# Altium PCB stm32cbt6.PcbDoc
Units mil, origin at the board's own origin, x right, y up, seen from the top; angles counter-clockwise.
Board outline 1579.03 x 1585.03 mil, 2 copper layers (Top Layer, Bottom Layer); 29 components, 17 nets, 121 pads, 15 vias.
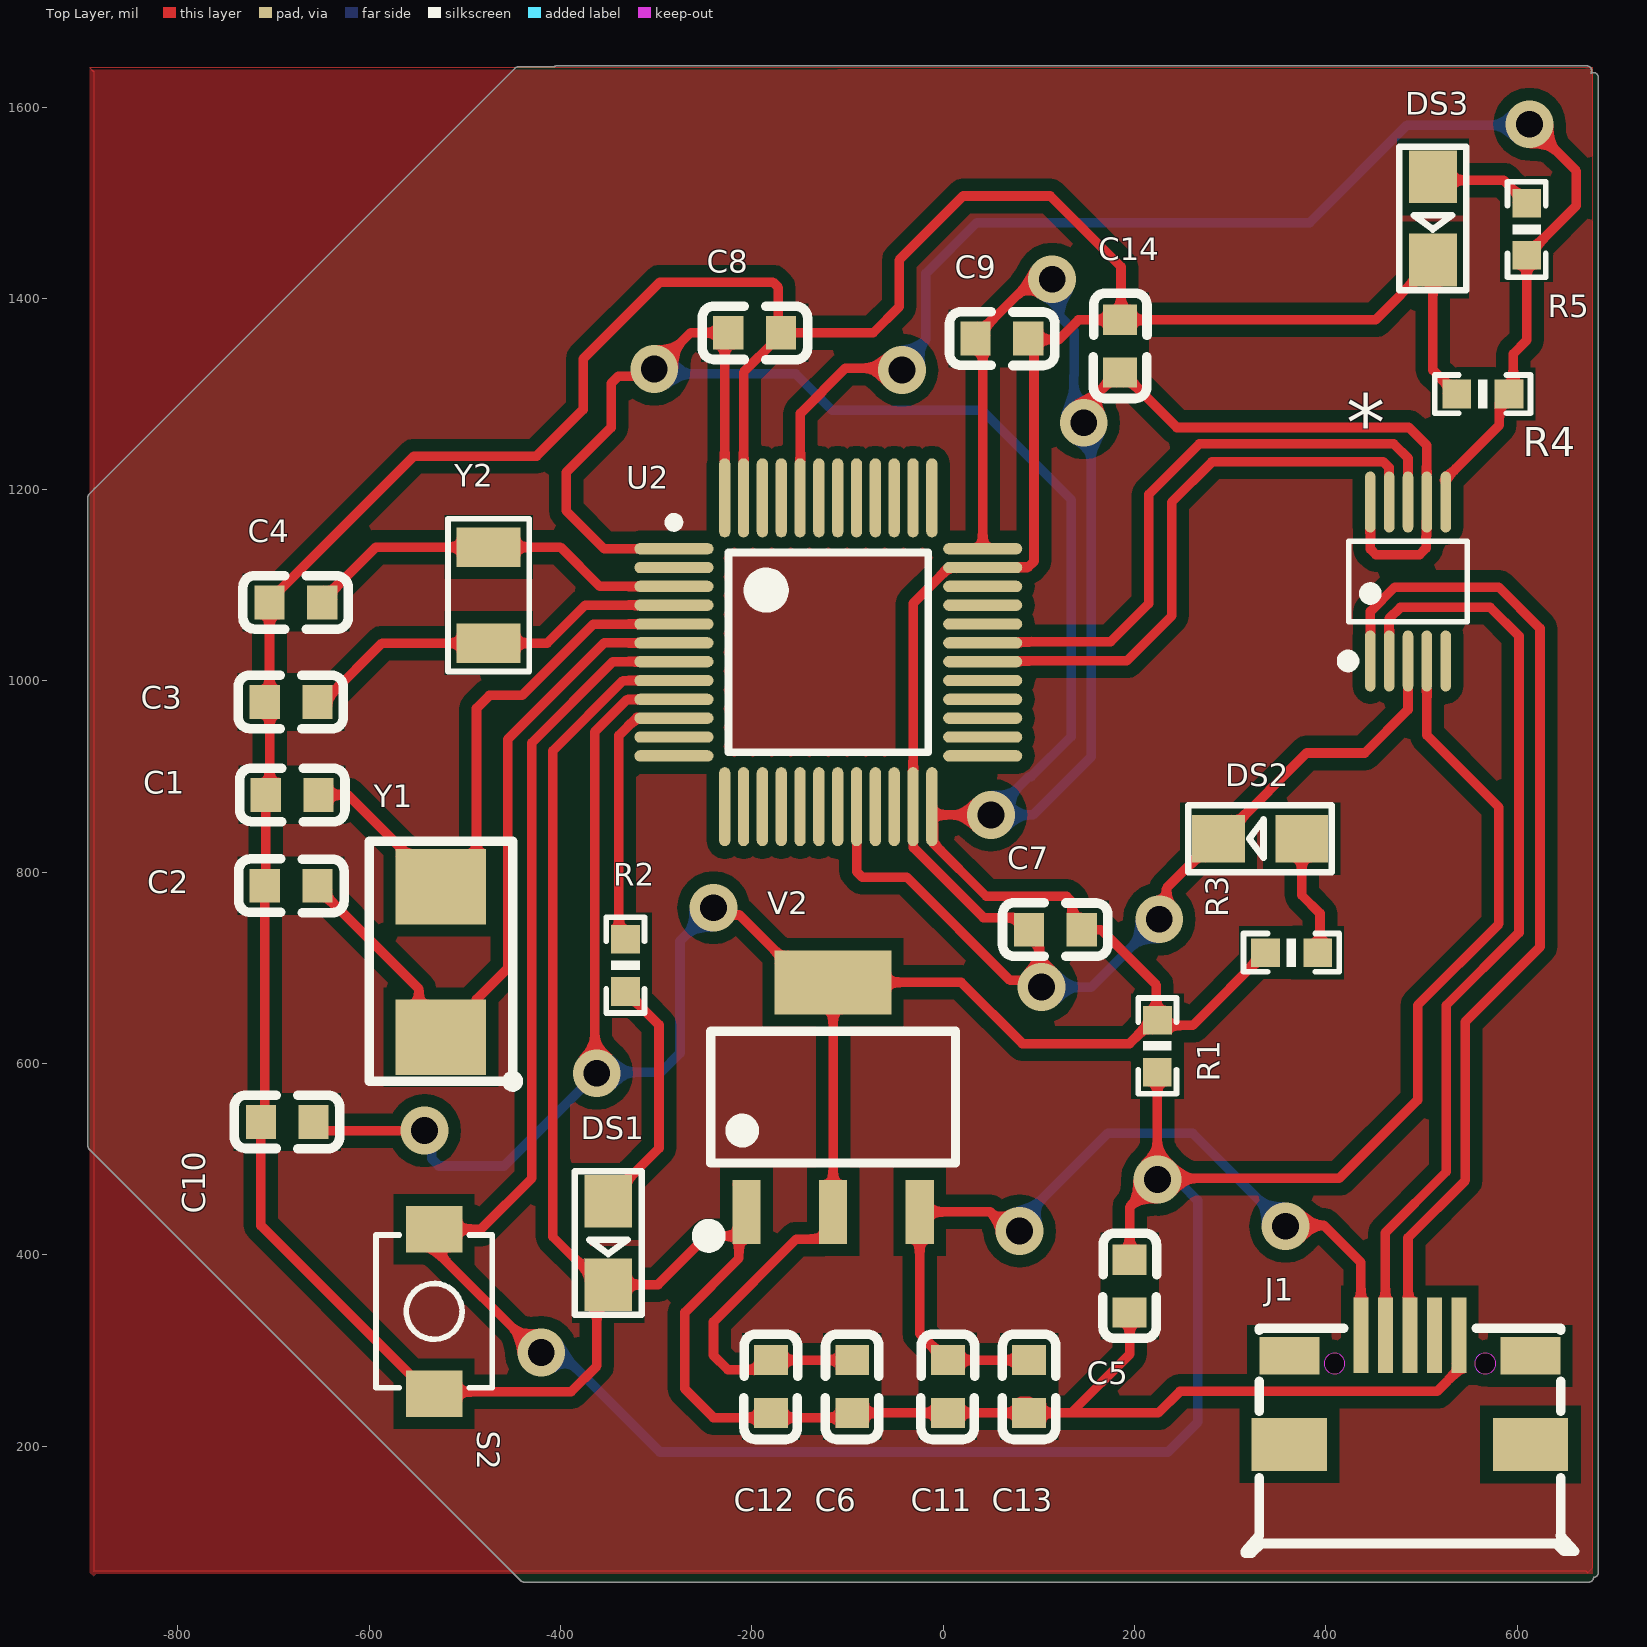
[diagram p0: Top Layer view]
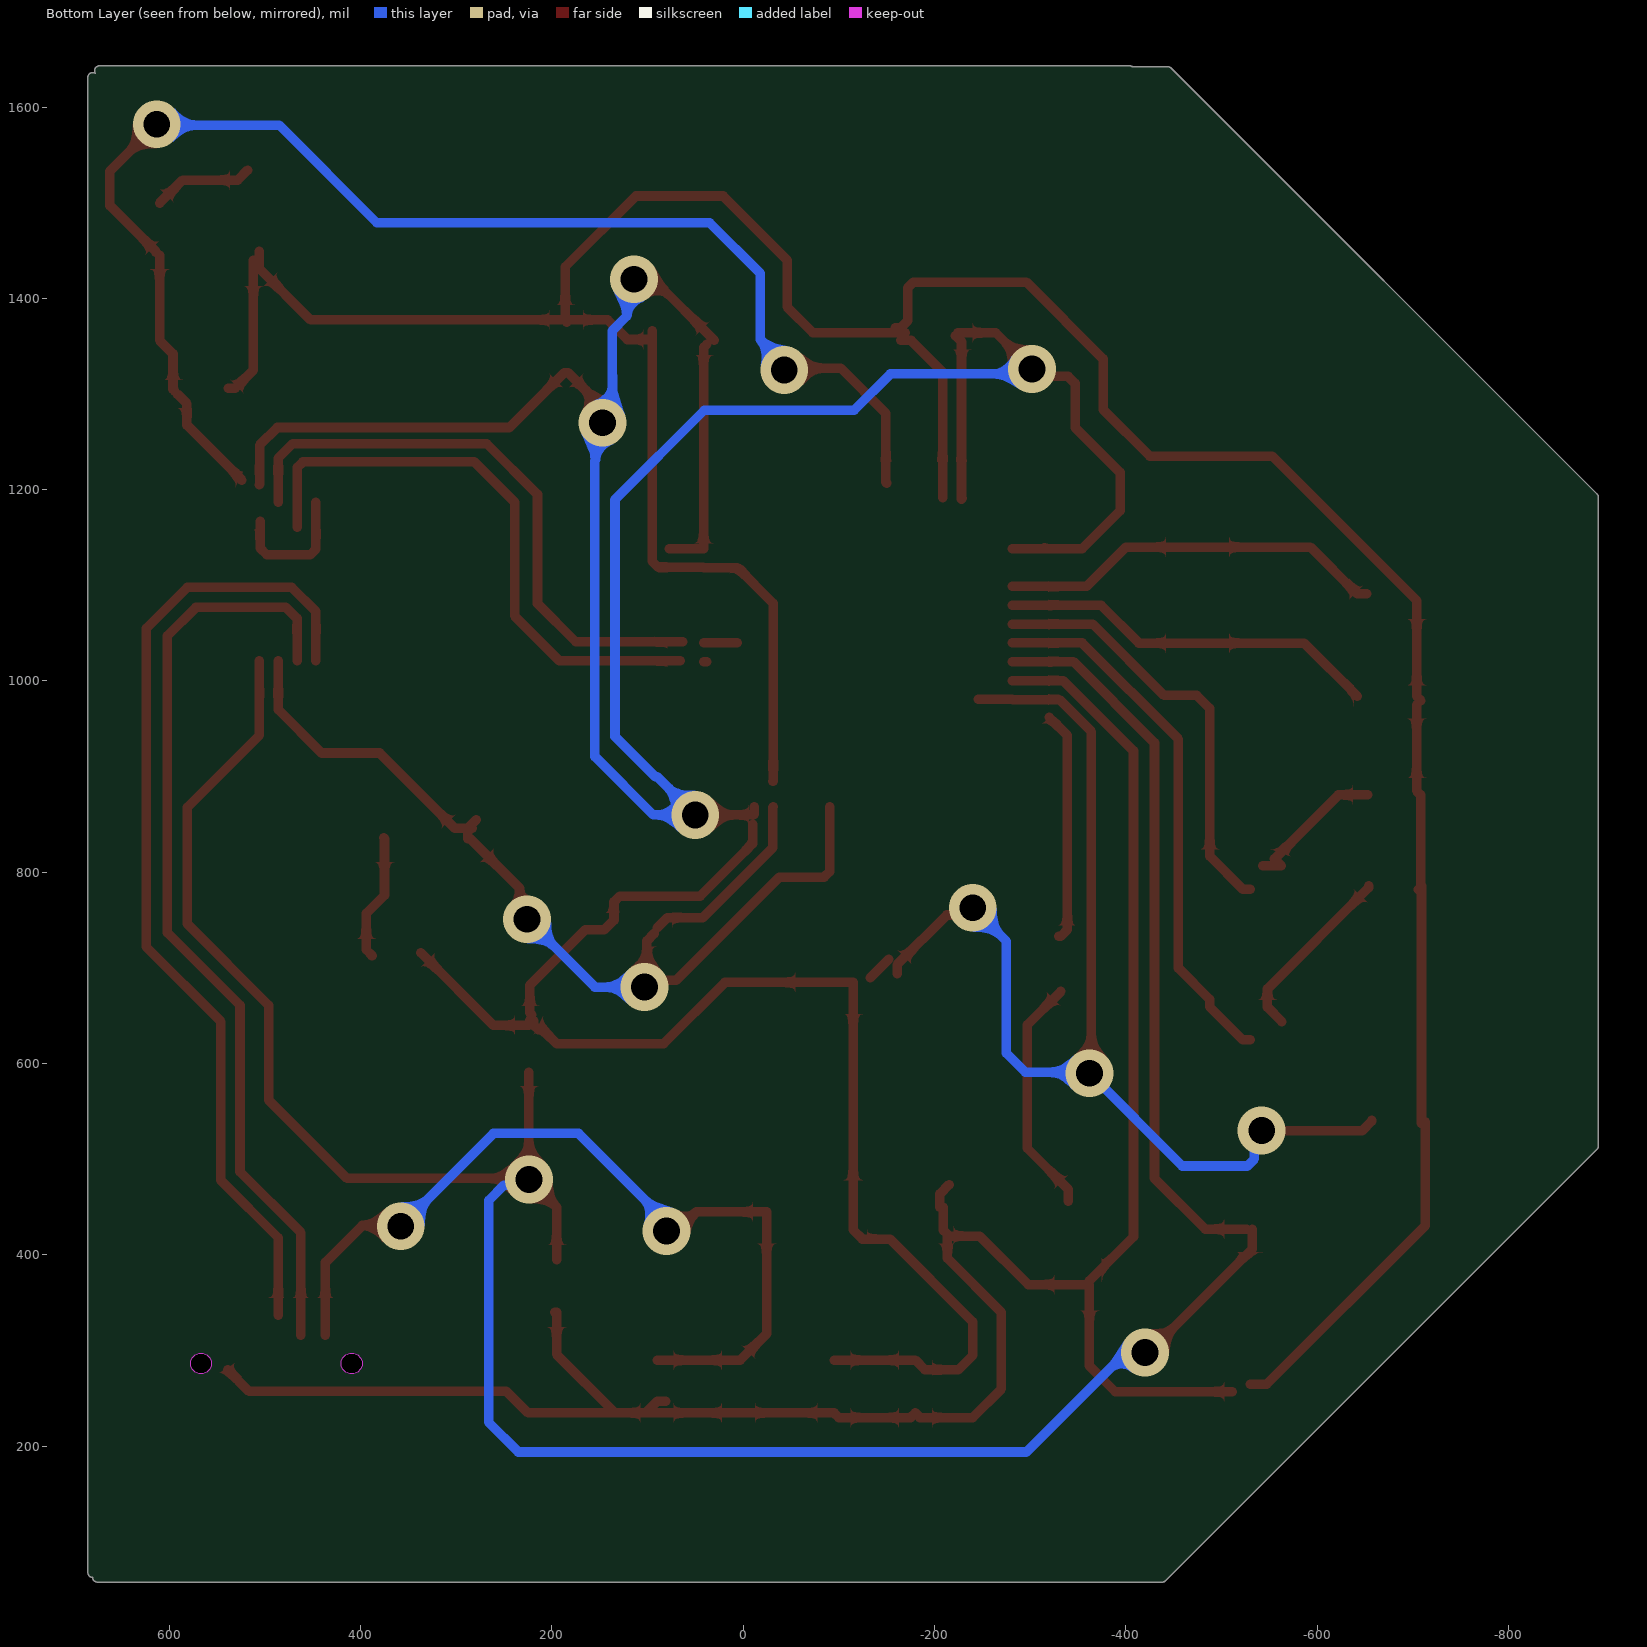
[diagram p1: Bottom Layer view, seen from below]

## Layer stack, top to bottom
Top Solder: solder mask 0.4, Solder Resist, Dk 3.5
Top Layer: signal copper 1.4
Dielectric 1: dielectric 12.6, FR-4, Dk 4.8
Bottom Layer: signal copper 1.4
Bottom Solder: solder mask 0.4, Solder Resist, Dk 3.5

## Board outline
-892.53,510.44 cw(c-889,514) -894.01,514 -894.01,1192 cw(c-889,1192) -892.53,1195.56 -892.55,1195.55 -447.55,1640.55 -447.56,1640.53 cw(c-444,1637) -444,1642.01 -407.01,1642.01 cw(c-404,1638) -404,1643.01 673,1643.01 cw(c673,1638) 678.01,1638 cw(c673,1638) 677.07,1635.07 cw(c680,1631) 685.01,1631 685.01,68 cw(c680,68) 680.01,62.99 cw(c675,63) 675,57.99 -438,57.99 cw(c-438,63) -441.56,59.47 -441.55,59.45

## Design rules (kind name [scope] priority, off if disabled: settings)
Clearance [All] p1: gap=3 ignorepadtopadclearanceinfootprint=TRUE
MinimumSolderMaskSliver [All] p1: minsoldermaskwidth=2
PolygonConnect [All] p1: connectstyle=Relief reliefconductorwidth=10 reliefentries=4 polygonreliefangle="90 Angle" airgapwidth=10
RoutingVias [All] p1: holewidth=28 width=50 viastyle="Through Hole" minholewidth=28 minwidth=50 maxholewidth=28 maxwidth=50
SilkToSolderMaskClearance [IsPad] p1: minsilkscreentomaskgap=2 clearancetoexposedcopper=TRUE
SolderMaskExpansion [All] p1: expansion=4
Width [All] p1: maxlimit=10 minlimit=10 preferedwidth=10
28 further rules are at their usual default settings.

## Classes and differential pairs
component class stm32f103cbt6: * C1 C2 C3 C4 C5 C6 C7 C8 C9 C10 C11 C12 C13 C14 DS1 DS2 J1 R1 R2 R3 R5 S2 U2 V2 Y1 Y2

## Components (designator, comment, footprint, x,y, rotation, side; value= is the part's Value field where it differs from the comment)
* "ch340x" MSOP-10_L3.0-W3.0-P0.50-LS5.0-BL 486,1104 r0 top
C1 "20pF" C0603 -680.56,881 r180 top
C2 "20pF" C0603 -681.56,786 r180 top
C3 "15pF" C0603 -681.56,978 r0 top
C4 "15pF" C0603 -676.56,1082 r0 top
C5 "100nF" C0603 195,367.44 r270 top
C6 "10uF" C0603 -95,262.44 r90 top
C7 "100nF" C0603 117.44,740 r0 top
C8 "100nF" C0603 -197,1364 r180 top
C9 "100nF" C0603 61.44,1358 r180 top
C10 "100nF" C0603 -685.56,539 r0 top
C11 "100nF" C0603 5,262.44 r90 top
C12 "100nF" C0603 -180,262.44 r90 top
C13 "10uF" C0603 90,262.44 r90 top
C14 "100nF" C0603 185,1350 r270 top
DS1 "LED2" SMDLED -349.94,456.03 r270 top
DS2 "LED1" SMDLED 374.97,835.06 r180 top
DS3 "LED2" SMDLED 512.06,1527.04 r270 top
J1 "Micro_USB" MICRO-USB-SMD_MICROQTJ 488,259 r0 top
R1 "10K" 0603P 224.06,618.5 r270 top
R2 "10K" 0603P -332,703 r270 top
R3 "10K" 0603P 364,716 r0 top
R4 "4.7K" 0603P 564,1300 r0 top
R5 "10K" 0603P 610,1472 r90 top
S2 "SW-PB" KEY-SMD_L3.9-W3.0-LS5.0 -532,341 r270 top
U2 "STM32F103C" LQFP-48_M -120,1030 r0 top
V2 "AMS1117-3V3" SOT223_L -115,565 r0 top
Y1 "8M" XTAL(5032) -525,706.26 r90 top
Y2 "32K768" CRYSTAL-SMD_L3.2-W1.5-1 -475,1089.8 r270 top

## Footprints (in the part's own frame and the unit in brackets; to place one, negate y for a bottom-side part, rotate by r counter-clockwise, add the part's x,y. Pads: shape width x height; smd on the part's side, far side on the other; paste and mask are expansions set on the pad)
0603P [mil]
  rect 30x30 smd: 1(-27,0) 2(27.5,-0.06)
  silkscreen extent -50,-20 50,20
C0603 [mm]
  rect 0.8x0.9 smd mask+0.051: 1(-0.7,0) 2(0.7,0)
  silkscreen extent -1.41,-0.71 1.39,0.72
CRYSTAL-SMD_L3.2-W1.5-1 [mil]
  rect 41.3x66.9 smd mask+2: 1(-50.2,0) 2(50.2,0)
  silkscreen extent -80,-43 80,43
KEY-SMD_L3.9-W3.0-LS5.0 [mil]
  rect 48.4x59.1 smd mask+2: 1(-86,0) 2(86,0)
  silkscreen extent -80,-61 80,61
LQFP-48_M [mm] "Thin QFP, 48-Leads, Body 7x7mm, Pitch 0.5mm, IPC Low Density"
  oval 2.1x0.3 smd: 1(-4.1,2.75) 2(-4.1,2.25) 3(-4.1,1.75) 4(-4.1,1.25) 5(-4.1,0.75) 6(-4.1,0.25) 7(-4.1,-0.25) 8(-4.1,-0.75) 9(-4.1,-1.25) 10(-4.1,-1.75) 11(-4.1,-2.25) 12(-4.1,-2.75) 25(4.1,-2.75) 26(4.1,-2.25) 27(4.1,-1.75) 28(4.1,-1.25) 29(4.1,-0.75) 30(4.1,-0.25) 31(4.1,0.25) 32(4.1,0.75) 33(4.1,1.25) 34(4.1,1.75) 35(4.1,2.25) 36(4.1,2.75)
  oval 0.3x2.1 smd: 13(-2.75,-4.1) 14(-2.25,-4.1) 15(-1.75,-4.1) 16(-1.25,-4.1) 17(-0.75,-4.1) 18(-0.25,-4.1) 19(0.25,-4.1) 20(0.75,-4.1) 21(1.25,-4.1) 22(1.75,-4.1) 23(2.25,-4.1) 24(2.75,-4.1) 37(2.75,4.1) 38(2.25,4.1) 39(1.75,4.1) 40(1.25,4.1) 41(0.75,4.1) 42(0.25,4.1) 43(-0.25,4.1) 44(-0.75,4.1) 45(-1.25,4.1) 46(-1.75,4.1) 47(-2.25,4.1) 48(-2.75,4.1)
  silkscreen extent -4.22,-2.65 2.65,3.57, body extent -3.5,-3.5 3.5,3.5, height 1.6
MICRO-USB-SMD_MICROQTJ [mm]
  rect 0.4x2 smd mask+0.051: 1(-1.3,1.452) 2(-0.65,1.452) 3(0,1.452) 4(0.65,1.452) 5(1.3,1.452)
  rect 1.6x1 smd mask+0.051: 6(-3.2,0.902) 9(3.2,0.902)
  rect 2x1.4 smd mask+0.051: 7(-3.2,-1.452) 8(3.2,-1.452)
  Keep-Out Layer board cut-out: -1.725,0.698 -1.725,0.753 -1.767,0.854 -1.844,0.931 -1.946,0.973 -2.055,0.973 -2.156,0.931 -2.233,0.854 -2.275,0.753 -2.275,0.698 -2.275,0.643 -2.233,0.542 -2.156,0.465 -2.055,0.423 -1.946,0.423 -1.844,0.465 -1.767,0.542 -1.725,0.643 -1.725,0.698 -1.725,0.698
  Keep-Out Layer board cut-out: 2.275,0.698 2.275,0.753 2.233,0.854 2.156,0.931 2.054,0.973 1.945,0.973 1.844,0.931 1.767,0.854 1.725,0.753 1.725,0.698 1.725,0.643 1.767,0.542 1.844,0.465 1.945,0.423 2.054,0.423 2.156,0.465 2.233,0.542 2.275,0.643 2.275,0.698 2.275,0.698
  silkscreen extent -4.37,-4.34 4.38,1.63
MSOP-10_L3.0-W3.0-P0.50-LS5.0-BL [mm]
  oval 0.28x1.62 smd mask+0.051: 1(-1,-2.11) 2(-0.5,-2.11) 3(0,-2.11) 4(0.5,-2.11) 5(1,-2.11) 6(1,2.11) 7(0.5,2.11) 8(0,2.11) 9(-0.5,2.11) 10(-1,2.11)
  silkscreen extent -1.74,-2.26 1.58,1.07
SMDLED [mm] "Chip Resistor, Body 2.0x1.2mm, IPC High Density"
  rect 1.4x1.27 smd: 1(0.001,-0.002) 2(2.211,-0.002)
  silkscreen extent -0.8,-0.89 3.01,0.89
SOT223_L [mm] "6.4x7x1.6mm(长宽高)"
  rect 0.75x1.7 smd: 1(-2.3,-3.048) 2(0,-3.048) 3(2.3,-3.048)
  rect 3.1x1.7 smd: 2(0,3.048)
  silkscreen extent -3.5,-3.88 3.25,1.75, body extent -3.25,-3.51 3.25,3.51, height 1.65
XTAL(5032) [mm]
  rect 2x2.4 smd: 1(-2,0) 2(2,0)
  silkscreen extent -3.32,-2.06 3.21,1.91

## Part data
C1 C2 C3 C4 C5 C6 C7 C8 C9 C10 C11 C12 C13 C14: library part Cap, "Capacitor", LatestRevisionDate=17-Jul-2002, LatestRevisionNote="Re-released for DXP Platform.", PackageDescription="Radial Cap, Thru-Hole; 2 Leads; 0.3 in Pin Spacing", PackageReference=RAD-0.3, Published=8-Jun-2000, Publisher="Altium Limited"
DS1 DS3: "Typical RED, GREEN, YELLOW, AMBER GaAs LED"
DS2: library part LED2, "Typical RED, GREEN, YELLOW, AMBER GaAs LED"
R1 R2 R3 R4 R5: library part R
S2: "Switch", LatestRevisionDate=17-Jul-2002, LatestRevisionNote="Re-released for DXP Platform.", PackageDescription="Switch; 2 Leads", PackageReference=SPST-2, Published=24-Mar-1999, Publisher="Altium Limited"
U2: "STM32单片机48引脚"
V2: library part AMS1117, "三端稳压芯片", BOM名称=稳压芯片, 学习资源=www.ooocke.com, 版权归属=源创客
Y1 Y2: library part XTAL, "Crystal Oscillator", LatestRevisionDate=17-Jul-2002, LatestRevisionNote="Re-released for DXP Platform.", PackageDescription="Crystal, Thru-Hole; 2 Leads; Body 3.1 x 8.2 mm (Dia.xH)", PackageReference=R38, Published=8-Jun-2000, Publisher="Altium Limited"

## Via types
v1: diameter 50, hole 28, Top Layer to Bottom Layer, 15 vias

## Nets (pads, with @x,y where several pads share a name; then routed paths per layer and width w, separated by ;. In a path a pad name is that pad's centre, name@x,y a point inside that pad or via, vN(x,y) a via of type N, cw(c..) or ccw(c..) an arc to the next point about the centre after c; other vN are vias at no path point)
3V3: *.7 *.10 C6.2 C7.2 C8.2 C9.2 C10.2 C12.2 C14.2 R1.1 R3.1 U2.1 U2.9 U2.24 U2.36 U2.48 V2.2 | length 5867.9
  Top Layer w10: C10.2@-657,541 -657,539.75 -647.25,530 v1(-542,530) ; v1@-366,596 -364,598 -364,947 -330.56,980.44 -281.76,980.44 U2.9 U2.9@-245.98,980.79 ; U2.1@-317.44,1138.86 -315.14,1138.86 U2.1@-315,1139 ; v1@-309,1332 -309,1329.82 -320.48,1318.35 -339.65,1318.35 -347,1311 -347,1265 -394,1218 -394,1178 -354.27,1138.27 U2.1 ; v1@-302,1325.43 v1(-302,1326) ; v1@-295,1333 -264,1364 C8.2 ; v1(-240,763) -232.35,755.35 -212.91,755.35 -161,703.44 V2.2@-161,694 ; U2.48@-228.27,1190.27 -229,1191 -228.27,1191.73 -228.27,1354.73 C8.2@-222,1361 ; V2.2@-152,709 V2.2@-133,690 ; C6.2 C12.2 -190,280 -225,280 -240,295 -240,330 -153.46,416.54 -124.76,416.54 -115,426.3 -115,445 -115,685 19,685 83,621 195,621 209.5,635.5 214.06,635.5 219,640.44 R1.1@219,645 ; U2.24 -11.73,860.84 -10.9,860 v1(50,860) ; U2.24@-10,850 -10,830.14 45.14,775 129.14,775 135,769.14 135,750 C7.2 165,740 223,682 223,653 R1.1@221,651 ; C9.2@30,1356 94,1420 v1(114,1420) ; C9.2@38,1352 41.42,1348.58 U2.36 U2.36@77.34,1138.27 ; v1@137,1277 137.59,1277 183.03,1322.44 C14.2 186.97,1322.44 244.41,1265 487,1265 505.49,1246.51 505.49,1205.51 *.7@506,1205 ; v1@148,1269 v1@150,1267 ; R1.1@220,644 R1.1@223,641 ; R1.1@223,645.5 R1.1@223,641 ; R3.1 261,640 224,640 R1.1@223,641 ; *.10 446.63,1137.86 452.49,1132 498,1132 505,1139 *.7@505,1167
  Bottom Layer w10: v1@-551,537 -534.35,520.35 -534.35,500.35 -527,493 -459,493 v1(-362,590) ; v1@-355,595 -351,591 -295,591 -275,611 -275,728 v1(-240,763) ; v1@-302,1321 -154,1321 -116,1283 40.67,1283 134,1189.67 134,942 92,900 90,900 v1@53.5,863.5 ; v1@52,865 v1@53.5,863.5 ; v1(114,1420) 121.65,1412.35 121.65,1381.35 137,1366 137,1319.41 136.59,1319 v1@136.59,1279.59 ; v1(147,1270) 154.65,1262.35 154.65,1230.35 155,1230 155,921 94,860 57,860 v1@53.5,863.5
+5: C11.2 C13.2 J1.1 V2.3 | length 902.7
  Top Layer w10: v1(80,425) 69.18,425 49.18,445 V2.3 -24.45,317.48 3.03,290 C11.2 C13.2 ; v1@362,433 364,431 398,431 436.8,392.2 J1.1
  Bottom Layer w10: v1(80,425) 80,435 172,527 261,527 357,431 v1@357,427
  other v1: 358,430
Boot0: *.6 R4.2 R5.1 U2.44 | length 1429.6
  Top Layer w10: U2.44@-150,1207 -149.24,1207.76 -149.24,1279.76 -102,1327 v1@-54,1327 ; *.6@524,1210 581.5,1267.5 581.5,1289.94 R4.2 ; R4.2@594,1303 596,1305 596,1342 610,1356 R5.1 ; v1(613,1582) 662,1533 662,1497 614,1449 R5.1@614,1448
  Bottom Layer w10: v1(-43,1325) -43,1331.57 -18,1356.57 -18,1426 35,1479 383,1479 485,1581 606,1581 v1@607,1580
D+: *.1 J1.3 | length 1032.6
  Top Layer w10: *.1 446.63,1072.63 472,1098 581,1098 624,1055 624,722 546,644 546,478 486,418 J1.3@486,337
D-: *.2 J1.2 | length 986
  Top Layer w10: J1.2 462.4,423.4 526,487 526,661 602,737 602,1047 572,1077 478,1077 466.32,1065.32 *.2
GND: *.3 C1.2 C2.2 C3.1 C4.1 C5.2 C6.1 C7.1 C8.1 C9.1 C10.1 C11.1 C12.1 C13.1 C14.1 DS1.2 DS2.2 DS3.2 J1.5 R4.1 S2.2 U2.8 U2.20 U2.23 U2.35 U2.47 V2.1 | length 7145.1
  Top Layer w10: C10.1 -713.12,430.77 -547.35,265 S2.2@-530,265 ; C10.1@-713,534 -709.12,537.88 C2.2 ; C3.1@-708.5,979.5 -704.12,983.88 C4.1 -704.12,1083.97 -553.09,1235 -425,1235 -376.28,1283.72 -376.28,1336.72 -296,1417 -178,1417 -172.14,1411.14 -172.14,1376.72 -164.43,1369 C8.1@-159,1369 ; C2.2@-706,782 -708.12,784.12 C1.2 -704,885.12 C3.1@-704,975 ; S2.2@-511,257 -389,257 -362,284 -362,368.99 DS1.2 -298.05,368.99 -247.27,419.78 -215.32,419.78 V2.1@-213.46,421.63 ; DS1.2@-362,373 -408.05,419.05 -408.05,926.95 -334.53,1000.47 U2.8 ; V2.1@-215.32,473.46 -205.55,463.7 V2.1@-205.55,450 ; V2.1@-209,450 -209,426.09 V2.1@-213.46,421.63 ; U2.47 -208.58,1322.89 -175.47,1356 C8.1@-165,1356 ; C8.1 -73,1364 -46,1391 -46,1440 21,1507 112,1507 186,1433 C14.1@186,1381 ; U2.20 -90.47,800.86 -84.61,795 -38,795 70,687 89,687 v1@96,680 ; U2.23 -31.07,868.24 -31.07,825.93 42.14,752.72 79.13,752.72 C7.1@89.88,741.97 ; U2.23@-31,895 -31.42,895.42 -31.42,1081.18 5.98,1118.58 U2.35 41.76,1118.93 88.93,1118.93 95,1125 C9.1@95,1366 ; C13.1@81,247 90,247 102,235 134,235 195,296 C5.2 C5.2@196.97,339.88 ; C7.1@93,736 100.63,728.37 v1@100.63,682.37 ; C9.1@97,1357 121,1357 141.56,1377.56 C14.1 C14.1@186.97,1377.56 ; C14.1@184.41,1375 C14.1@186.97,1377.56 ; v1(226,751) 233.65,758.65 233.65,783.41 285.37,835.13 DS2.2 DS2.2@287.93,846 ; DS2.2@278.87,855.13 DS2.2@288,846 ; DS2.2@283,846 DS2.2@287.93,846 ; *.3 486,970 440.74,924.74 380.1,924.74 301.36,846 DS2.2@288,846 ; DS3.2@506,1449 506,1431.44 452.12,1377.56 C14.1@186.97,1377.56 ; DS3.2 512,1325 531,1306 R4.1@538,1306 ; J1.5@539,280 516.44,257.44 247.44,257.44 224.88,234.88 C13.1 C11.1 C6.1 -99.88,230 -175.12,230 C12.1 -184.88,230 -240,230 -270,260 -270,340 -213.46,396.54 V2.1@-213.46,421.63 ; DS2.2@287.93,846 DS2.2@288,846
  Bottom Layer w10: v1@102,682 104,680 155,680 v1(226,751)
  other v1: 103,680
LED: R2.1 U2.10 | length 241.8
  Top Layer w10: R2.1@-330,733 -332,733 -339,740 -339,943 U2.10@-320,962
NetC1_1: C1.1 U2.5 Y1.2 | length 608.7
  Top Layer w10: C1.1 -622.25,881 -555.32,814.07 -562.39,807 Y1.2@-543,807 ; Y1.2@-530,782.48 -522.13,782.48 -487.76,816.85 -487.76,971.39 -474.14,985 -440,985 -365.47,1059.53 U2.5
NetC2_1: C2.1 U2.6 Y1.1 | length 757.2
  Top Layer w10: C2.1 -654,784.03 -548,678.03 -548,659 Y1.1@-563,644 ; Y1.1@-530,625 -522.13,625 -487.76,659.37 -487.76,667.24 -455,700 -455,939.14 -354.3,1039.84 U2.6
NetDS1_1: DS1.1 R2.2 | length 251.8
  Top Layer w10: DS1.1@-340,456 -340,468.56 -297,511.56 -297,640.44 R2.2
NetDS2_1: DS2.1 R3.2 | length 133.7
  Top Layer w10: DS2.1@375.81,836 DS2.1 374.94,776.06 394,757 394,719 R3.2@388,713
NetDS3_1: DS3.1 R5.2 | length 106.4
  Top Layer w10: DS3.1@518,1534 528.36,1523.64 585.92,1523.64 R5.2
NRST: *.4 C5.1 R1.2 S2.1 U2.7 | length 3009.9
  Top Layer w10: S2.1 -532,406 -429,303 -424,303 v1@-412,315 ; S2.1@-526.65,427 -483,427 -430,480 -430,935.28 -345.12,1020.16 U2.7 ; C5.1 195,450 v1@222,477 ; v1@222,482 224,480 414,480 496,562 496,661 581,746 581,868 505.69,943.31 *.4 *.4@505.89,1020.73 ; v1@224,482 R1.2
  Bottom Layer w10: v1(-420,298) -400,298 -296,194 235,194 266,225 266,457 250,473 228,473 v1@222,479
  other v1: 224,479
osc32in: C4.2 U2.3 Y2.1 | length 407.9
  Top Layer w10: C4.2@-652,1091 -641.97,1091 -592.97,1140 Y2.1 -400,1140 -358.9,1098.9 U2.3
osc32out: C3.2 U2.4 Y2.2 | length 400
  Top Layer w10: C3.2@-642,984 -586.4,1039.6 Y2.2 -413.83,1039.6 -374.21,1079.21 U2.4
RX: *.8 U2.31 | length 663.1
  Top Layer w10: U2.31@5.98,1039.84 U2.31 ; U2.31@63,1041 175,1041 215,1081 215,1195 268,1248 471,1248 486,1233 *.8
TX: *.9 U2.30 | length 624.4
  Top Layer w10: U2.30@38,1020 38.16,1020.16 U2.30 ; U2.30@66,1021 192,1021 239,1068 239,1187 281,1229 460.27,1229 466.12,1223.14 466.12,1187.27 *.9 *.9@466.32,1160.69
pads on no net: *.5 J1.4 J1.6 J1.7 J1.8 J1.9 U2.2 U2.11 U2.12 U2.13 U2.14 U2.15 U2.16 U2.17 U2.18 U2.19 U2.21 U2.22 U2.25 U2.26 U2.27 U2.28 U2.29 U2.32 U2.33 U2.34 U2.37 U2.38 U2.39 U2.40 U2.41 U2.42 U2.43 U2.45 U2.46

## Polygon pours and split planes (outlines as drawn)
no net on Top Layer "Top Layer-No Net 1" (solid, pour order 20): -892,1639 -892,68 -888,64 -885,67 679,67 679,1638 672,1645 672,1640
no net on Top Layer "Top Layer-No Net 2" (solid, pour order 18): -652,1416
no net on Top Layer "Top Layer-No Net 4" (solid, pour order 16): -732,1460
no net on Top Layer "Top Layer-No Net 5" (solid, pour order 14): -892,1641 -888,1637 -888,70 672,70 674,68 679,73 679,1641
no net on Top Layer "Top Layer-No Net 3" (solid, pour order 8): -450,992
no net on Top Layer "Top Layer-No Net" (solid, pour order 4): 670,210
no net on Mechanical 1 (solid): -649,1323

## Silkscreen, mask and mechanical layers (free items; w line width, h text height)
Drill Drawing:
  lines w10: -406,1637 -888,1637 -889,1636 -889,63 675,63 680,68 680,1631 673,1638 -404,1638